# Altium PCB PCB_Minuteire.PcbDoc
Units mm, origin at the board's own origin, x right, y up, seen from the top; angles counter-clockwise.
Board outline 100 x 100 mm, 2 copper layers (Top Layer, Bottom Layer), stack 1.671 mm thick; 18 components, 24 nets, 92 pads, 1 vias.
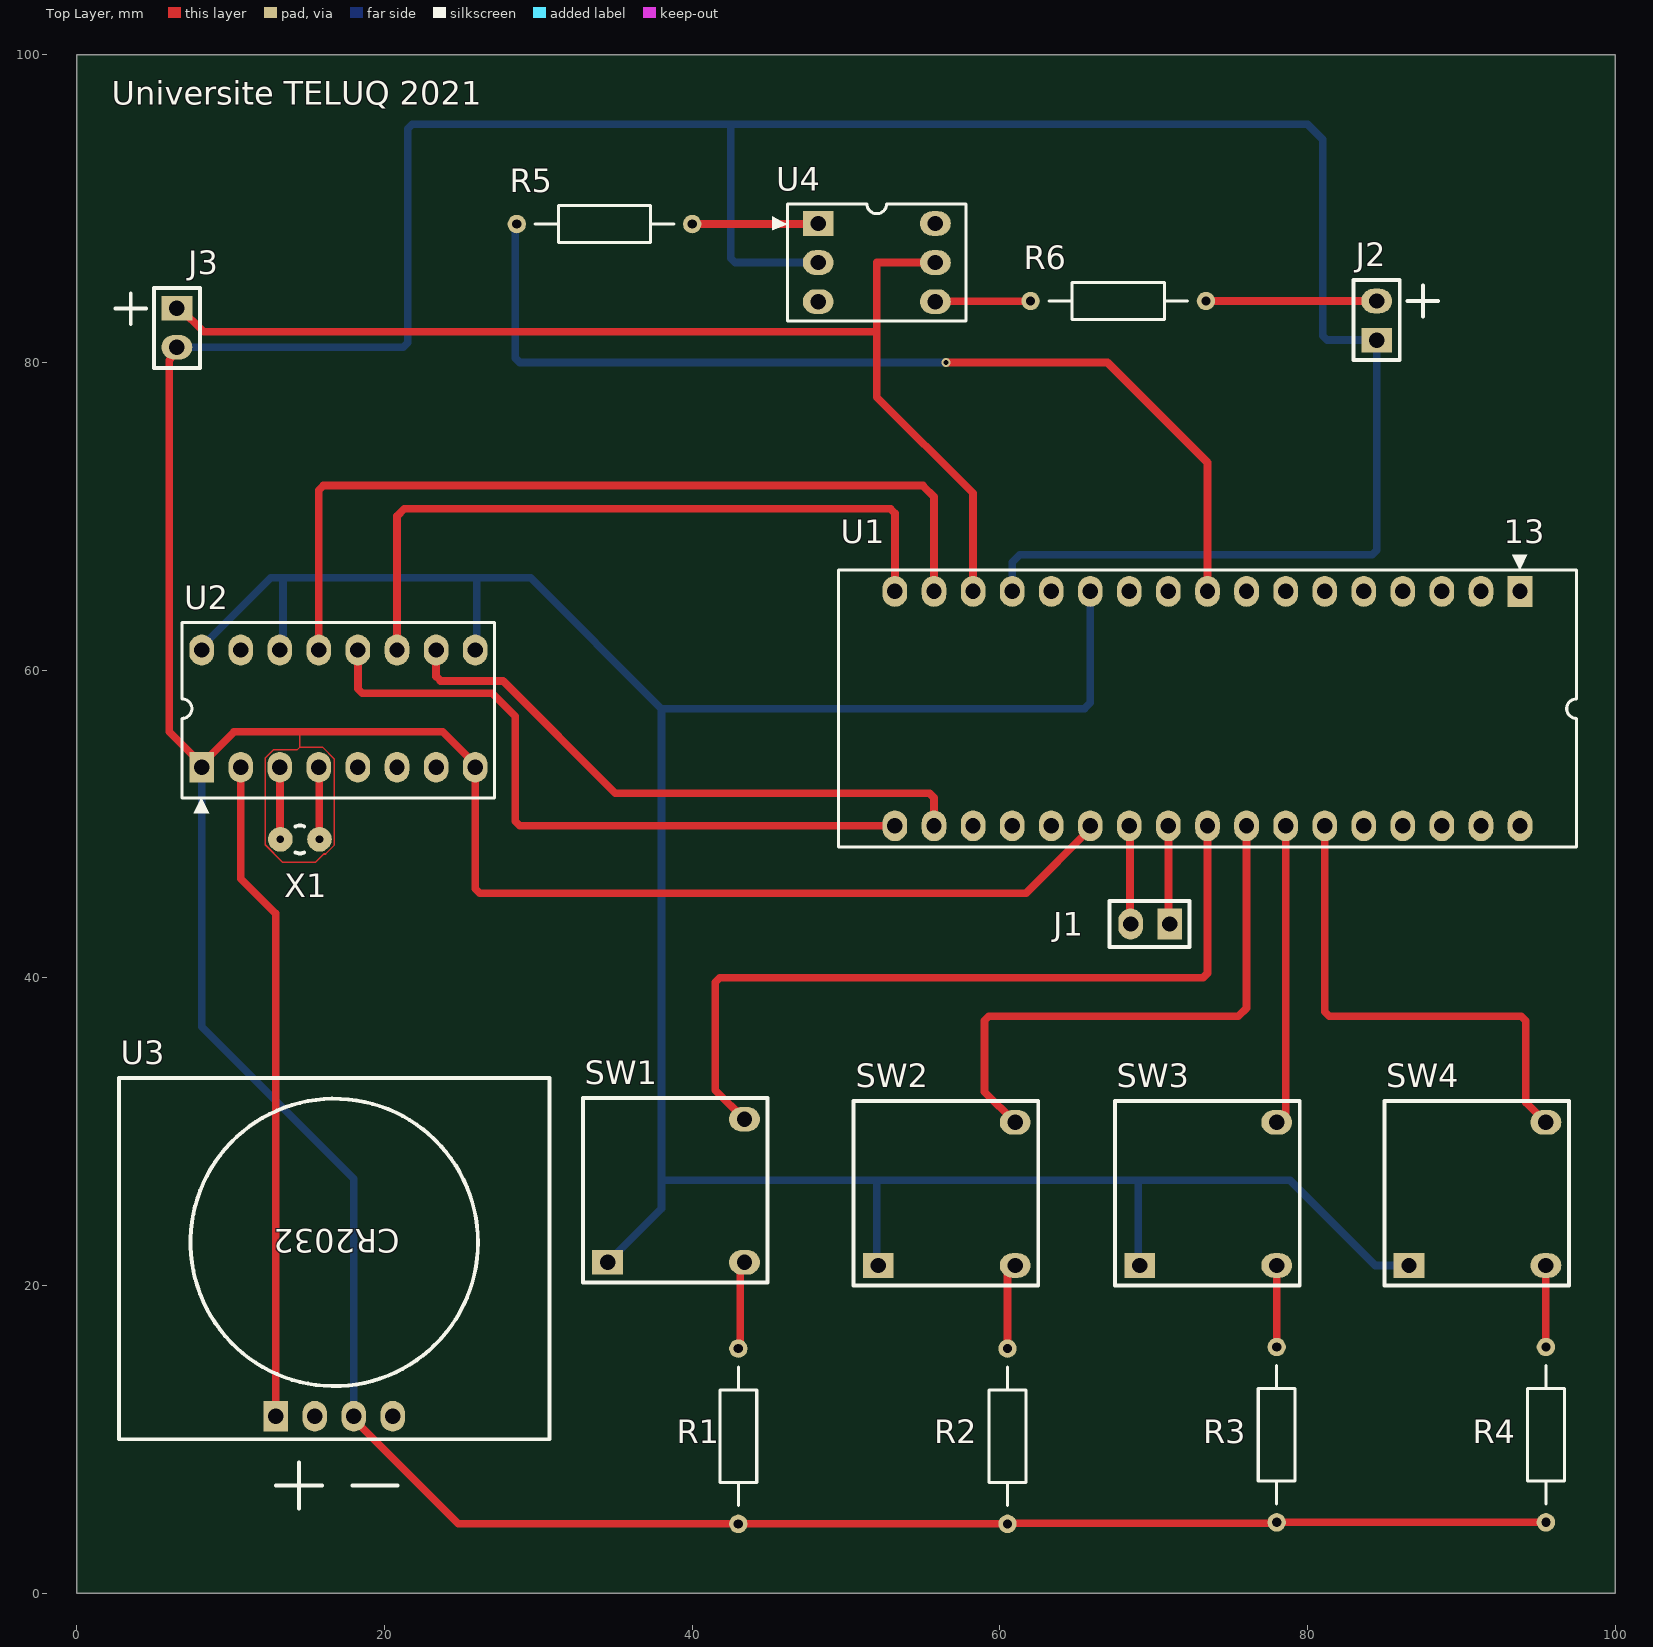
[diagram p0: Top Layer view]
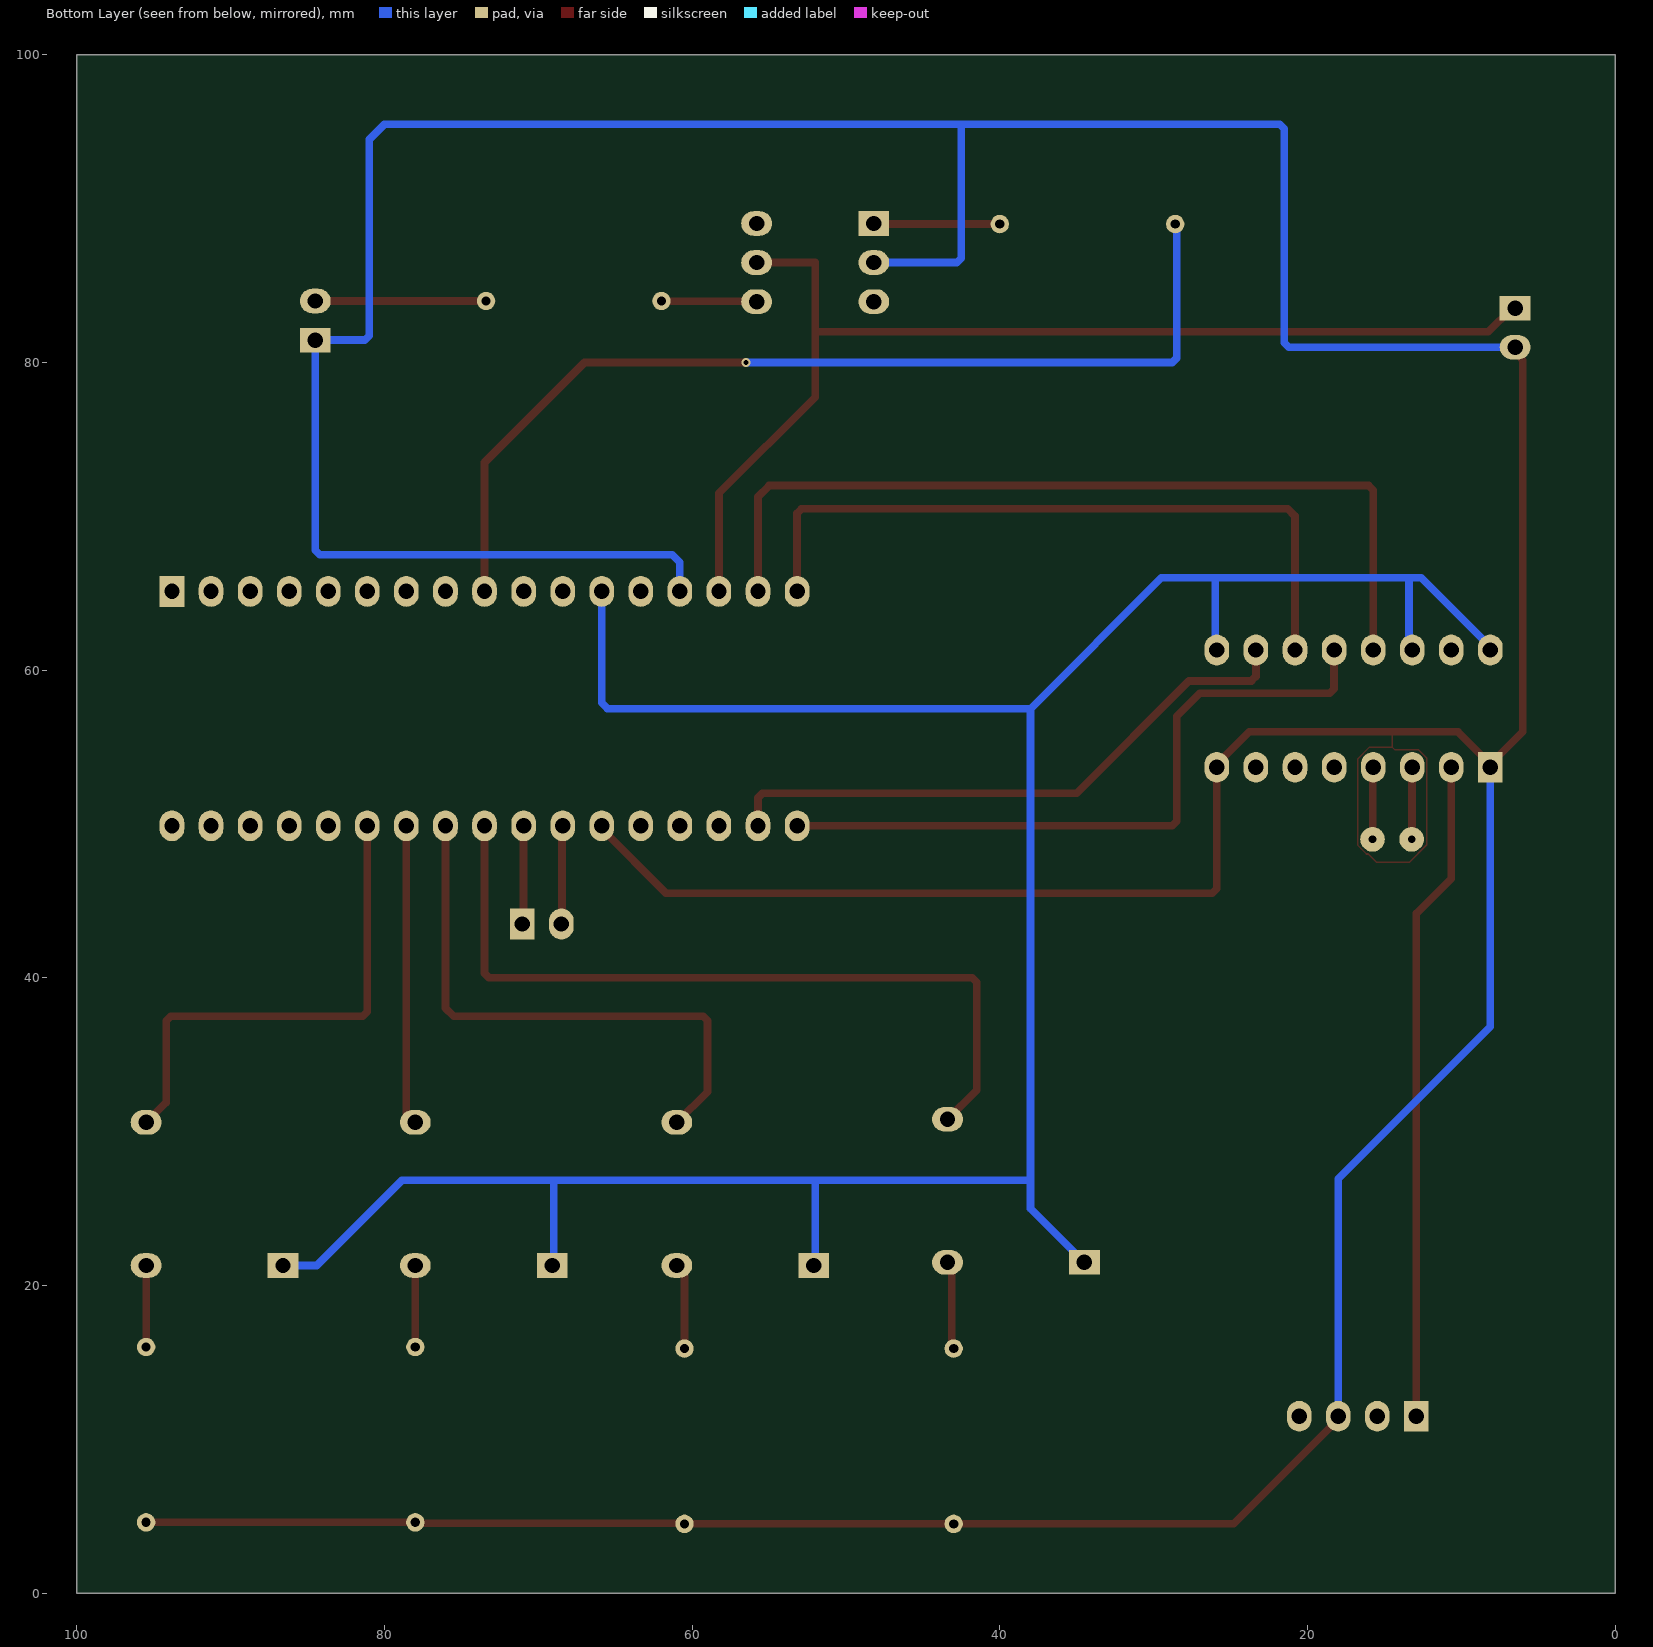
[diagram p1: Bottom Layer view, seen from below]

## Layer stack, top to bottom
Top Solder: solder mask 0.0102, Solder Resist, Dk 3.5
Top Layer: signal copper 0.0356
Dielectric 1: dielectric 1.6, FR-4, Dk 4.8
Bottom Layer: signal copper 0.0356
Bottom Solder: solder mask 0.0102, Solder Resist, Dk 3.5

## Board outline
0,0 0,100 100,100 100,0

## Design rules (kind name [scope] priority, off if disabled: settings)
Clearance [All] p1: gap=0.1 ignorepadtopadclearanceinfootprint=FALSE
PolygonConnect [All] p1: connectstyle=Relief reliefconductorwidth=0.254 reliefentries=4 polygonreliefangle="90 Angle" airgapwidth=0.254
RoutingVias [All] p1: holewidth=0.3 width=0.6 viastyle="Through Hole" minholewidth=0.3 minwidth=0.6 maxholewidth=0.3 maxwidth=0.6
SolderMaskExpansion [All] p1: expansion=0.102 istentingtop=FALSE
Width [All] p1: maxlimit=1 minlimit=0.08 preferedwidth=0.5
30 further rules are at their usual default settings.

## Components (designator, comment, footprint, x,y, rotation, side; value= is the part's Value field where it differs from the comment)
J1 "2 pin header" "Dual header" 71.04,43.5 r270 top
J2 "2 pin header" "Dual header" 84.5,81.46 r180 top
J3 "2 pin header" "Dual header" 6.5,83.54 r0 top
R1 "10K" Res_TH 43,4.5 r90 top
R2 "10K" Res_TH 60.5,4.5 r90 top
R3 "10K" Res_TH 78,4.6 r90 top
R4 "10K" Res_TH 95.5,4.6 r90 top
R5 "1K" Res_TH 28.6,89 r0 top
R6 "1K" Res_TH 62,84 r0 top
SW1 "Push Button" "Push button" 38.9,26.2 r0 top
SW2 "Push Button" "Push button" 56.5,26 r0 top
SW3 "Push Button" "Push button" 73.5,26 r0 top
SW4 "Push Button" "Push button" 91,26 r0 top
U1 "Arduino Micro" Micro-C 73.5,57.5 r270 top
U2 "RTC" DIP16 17,57.5 r90 top
U3 "CR2032 Socket" "Battery socket" 16.73,11.5 r90 top
U4 "Optocoupler" DIP6 52,86.5 r0 top
X1 "Crystal 32.768kHz" Crystal 14.5,49 r180 top

## Footprints (in the part's own frame and the unit in brackets; to place one, negate y for a bottom-side part, rotate by r counter-clockwise, add the part's x,y. Pads: shape width x height; smd on the part's side, far side on the other; paste and mask are expansions set on the pad)
"Battery socket" [mm]
  rect 2x1.6 hole 1: 1(0,3.81)
  oval 2x1.6 hole 1: 2(0,1.27) 3(0,-1.27) 4(0,-3.81)
  silkscreen extent -6,-14 22,14
Crystal [mm]
  round 1.6 hole 0.5: 1(-1.27,0) 2(1.27,0)
  silkscreen extent -0.28,-0.9 0.28,0.9
DIP6 [mm]
  rect 2x1.6 hole 1: 1(-3.81,2.54)
  oval 2x1.6 hole 1: 2(-3.81,0) 3(-3.81,-2.54) 4(3.81,-2.54) 5(3.81,0) 6(3.81,2.54)
  silkscreen extent -6.8,-3.81 5.8,3.81
DIP16 [mm]
  rect 2x1.6 hole 1: 1(-3.81,8.89)
  oval 2x1.6 hole 1: 2(-3.81,6.35) 3(-3.81,3.81) 4(-3.81,1.27) 5(-3.81,-1.27) 6(-3.81,-3.81) 7(-3.81,-6.35) 8(-3.81,-8.89) 9(3.81,-8.89) 10(3.81,-6.35) 11(3.81,-3.81) 12(3.81,-1.27) 13(3.81,1.27) 14(3.81,3.81) 15(3.81,6.35) 16(3.81,8.89)
  silkscreen extent -6.8,-10.16 5.6,10.16
"Dual header" [mm]
  rect 2x1.6 hole 1: 1(0,0)
  oval 2x1.6 hole 1: 2(0,-2.54)
  silkscreen extent -1.5,-3.9 1.5,1.3
Micro-C [mm]
  rect 2x1.6 hole 1: 1(-7.62,20.32)
  oval 2x1.6 hole 1: 2(-7.62,17.78) 3(-7.62,15.24) 4(-7.62,12.7) 5(-7.62,10.16) 6(-7.62,7.62) 7(-7.62,5.08) 8(-7.62,2.54) 9(-7.62,0) 10(-7.62,-2.54) 11(-7.62,-5.08) 12(-7.62,-7.62) 13(-7.62,-10.16) 14(-7.62,-12.7) 15(-7.62,-15.24) 16(-7.62,-17.78) 17(-7.62,-20.32) 18(7.62,-20.32) 19(7.62,-17.78) 20(7.62,-15.24) 21(7.62,-12.7) 22(7.62,-10.16) 23(7.62,-7.62) 24(7.62,-5.08) 25(7.62,-2.54) 26(7.62,0) 27(7.62,2.54) 28(7.62,5.08) 29(7.62,7.62) 30(7.62,10.16) 31(7.62,12.7) 32(7.62,15.24) 33(7.62,17.78) 34(7.62,20.32)
  silkscreen extent -10,-24 9,23.99
"Push button" [mm]
  rect 2x1.6 hole 1: 1(-4.4,-4.7)
  oval 2x1.6 hole 1: 2(4.5,4.6) 3(4.5,-4.7)
  silkscreen extent -6,-6 6,6
Res_TH [mm]
  round 1.2 hole 0.6: 1(0,0) 2(11.4,0)
  silkscreen extent 1.2,-1.2 10.2,1.2, body extent -0.36,-1.31 11.7,1.31, height 2.61

## Part data
J1 J2 J3: library part M20-9990246, "2.54mm (0.1\") Pitch SIL Vertical PC Tail Pin Header, 6.1mm mating pin height, tin, 2 contacts", Case/Package=SIL, Color=Black, Contact Resistance=30mR, Current Rating=3A, Insulation Resistance=10GR, Manufacturer=Harwin, Max Operating Temperature=105°C, Min Operating Temperature=-40°C, Package Quantity=1000, Supplier Part Number 1=952-2262-ND, Voltage Rating (AC)=750V, Category="Headers and Wire Housings", ComponentLink1Description=https://datasheet.ciiva.com/22660/1830818-22660571.pdf?src-supplier=Element14, ComponentLink1URL=https://datasheet.ciiva.com/22660/1830818-22660571.pdf?src-supplier=Element14, ComponentLink2Description=https://datasheet.ciiva.com/11745/0900766b81034e61-11745755.pdf?src-supplier=RSComponents, ComponentLink2URL=https://datasheet.ciiva.com/11745/0900766b81034e61-11745755.pdf?src-supplier=RSComponents, ComponentLink3Description=https://datasheet.ciiva.com/8046/315376-8046930.pdf?src-supplier=Element14, ComponentLink3URL=https://datasheet.ciiva.com/8046/315376-8046930.pdf?src-supplier=Element14, ComponentLink4Description=https://datasheet.ciiva.com/6833/m20-999-6833368.pdf?src-supplier=Digi-Key, ComponentLink4URL=https://datasheet.ciiva.com/6833/m20-999-6833368.pdf?src-supplier=Digi-Key, ComponentLink5Description=https://datasheet.ciiva.com/26852/getdatasheetpartid-384170-26852203.pdf?src-supplier=Verical, ComponentLink5URL=https://datasheet.ciiva.com/26852/getdatasheetpartid-384170-26852203.pdf?src-supplier=Verical, Connector Type="Male Pin", Contact Material=Brass,Bronze, Contact Mating Length=0.24inch, Contact Plating=Tin, Contact Type="Male Pin", Depth=2.54mm, Gender=Male, Housing Color=Black, Housing Material=Nylon, Length=5.08mm, Manufacturer Part Number=M20-9990246, Max Current Rating=3A, Mount="Through Hole", Number of Contacts=2, Number of Positions=2, Number of Rows=1, Orientation=Straight, Packaging=Bulk, Pitch=2.54mm, Pricing 1="1=0.13000, 10=0.10300, 100=0.07610, 500=0.06300, 1000=0.05512, 5000=0.04725, 10000=0.04594 (USD)", Radiation Hardening=No, REACH SVHC="No SVHC", RoHS=Yes, Series=M20, Stock 1=37006, Supplier 1=Digi-Key, Termination=Solder
R1 R2 R3 R4: library part MFR-25FRF52-10K, "Res Metal Film 10K Ohm 1% 1/4W ±100ppm/°C Conformal Axial Thru-Hole T/R", Case/Package=Axial, Manufacturer=Yageo, Max Operating Temperature=155°C, Max Power Dissipation=250mW, Min Operating Temperature=-55°C, Package Quantity=5000, Resistance=10kR, Resistor Type="Metal Film", Supplier Part Number 1=10.0KXTR-ND, Temperature Coefficient=100ppm/°C, Tolerance=1%, Voltage Rating=250V, Voltage Rating (DC)=200V, Category="Through-Hole Resistors", ComponentLink1Description=https://datasheet.ciiva.com/25645/yageolr-mfr-2013-25645549.pdf?src-supplier=Digi-Key, ComponentLink1URL=https://datasheet.ciiva.com/25645/yageolr-mfr-2013-25645549.pdf?src-supplier=Digi-Key, Lead Diameter=0.6mm, Lead Free="Lead Free", Length=0.248inch, Manufacturer Part Number=MFR-25FRF52-10K, Number of Terminations=2, Packaging="Tape and Reel", Power Rating=250mW, Pricing 1="5000=0.01047, 10000=0.00939, 25000=0.00862, 50000=0.00819 (USD)", RoHS=Yes, RoHS Compliant=Yes, Series=MFR, Stock 1=345000, Supplier 1=Digi-Key, Termination=Axial, Width=6.3mm
R5 R6: library part MFR-25FRF52-1K, "Res Metal Film 1K Ohm 1% 0.25W(1/4W) ±100ppm/C AXL Automotive T/R", Case/Package=Axial, Manufacturer=Yageo, Max Operating Temperature=155°C, Max Power Dissipation=250mW, Min Operating Temperature=-55°C, Package Quantity=5000, Resistance=1kR, Resistor Type="Metal Film", Supplier Part Number 1=1.00KXTR-ND, Temperature Coefficient=100ppm/°C, Tolerance=1%, Voltage Rating=250V, Voltage Rating (DC)=200V, Category="Through-Hole Resistors", ComponentLink1Description=https://datasheet.ciiva.com/25645/yageolr-mfr-2013-25645548.pdf?src-supplier=Digi-Key, ComponentLink1URL=https://datasheet.ciiva.com/25645/yageolr-mfr-2013-25645548.pdf?src-supplier=Digi-Key, Lead Diameter=0.6mm, Lead Free="Lead Free", Length=0.248inch, Manufacturer Part Number=MFR-25FRF52-1K, Mount="Through Hole", Number of Terminations=2, Packaging="Tape and Reel", Power Rating=250mW, Pricing 1="5000=0.01047, 10000=0.00939, 25000=0.00862, 50000=0.00819 (USD)", RoHS=Yes, RoHS Compliant=Yes, Series=MFR, Stock 1=95000, Supplier 1=Digi-Key, Termination=Axial, Width=6.3mm
SW1 SW2 SW3 SW4: library part FSM103, "Switch Tactile OFF (ON) SPST Round Button PC Pins 0.05A 24VDC 1.57N Thru-Hole Loose", Actuator Color=Black, Contact Current Rating=50mA, Contact Resistance=100mR, Manufacturer="TE Connectivity Alcoswitch", Max Operating Temperature=85°C, Max Voltage Rating (DC)=12V, Min Operating Temperature=-35°C, Operating Force=1.57N, Package Quantity=400, Supplier Part Number 1=450-1158-ND, Voltage Rating=24V, Actuator Length=3.4mm, Actuator Material=Polyester, Category=Uncategorized, ComponentLink1Description=https://datasheet.ciiva.com/8661/eng-cd-1437565-5-d-8661873.pdf?src-supplier=Avnet, ComponentLink1URL=https://datasheet.ciiva.com/8661/eng-cd-1437565-5-d-8661873.pdf?src-supplier=Avnet, ComponentLink2Description=https://datasheet.ciiva.com/2899/eng-cd-1437565-5-e2-2899955.pdf?src-supplier=Digi-Key, ComponentLink2URL=https://datasheet.ciiva.com/2899/eng-cd-1437565-5-e2-2899955.pdf?src-supplier=Digi-Key, ComponentLink3Description=https://datasheet.ciiva.com/5809/eng-cd-1437565-5-e2-5809302.pdf?src-supplier=Farnell, ComponentLink3URL=https://datasheet.ciiva.com/5809/eng-cd-1437565-5-e2-5809302.pdf?src-supplier=Farnell, ComponentLink4Description=https://datasheet.ciiva.com/16534/eng-cd-1437565-5-d-16534933.pdf?src-supplier=Avnet+Europe, ComponentLink4URL=https://datasheet.ciiva.com/16534/eng-cd-1437565-5-d-16534933.pdf?src-supplier=Avnet+Europe, ComponentLink5Description=https://datasheet.ciiva.com/31838/eng-cat-1308390-0904-e15-e25-31838910.pdf?src-supplier=Onlinecomponents.com, ComponentLink5URL=https://datasheet.ciiva.com/31838/eng-cat-1308390-0904-e15-e25-31838910.pdf?src-supplier=Onlinecomponents.com, ComponentLink6Description=https://datasheet.ciiva.com/7635/921681-7635435.pdf?src-supplier=Element14, ComponentLink6URL=https://datasheet.ciiva.com/7635/921681-7635435.pdf?src-supplier=Element14, Contact Material=Brass, Contact Plating=Silver, Current Rating=50mA, Depth=14.1mm, Electrical Life=100000Cycles, Illumination Type=Non-Illuminated, Length=12mm, Manufacturer Part Number=FSM103, Max Current Rating=50mA, Mechanical Life=100000Cycles, Mount="Through Hole", Orientation=Straight, Packaging="Loose Piece", Pricing 1="1=0.38000, 10=0.36900, 25=0.34720, 100=0.30150, 250=0.27348, 500=0.25440, 1000=0.22896, 2500=0.21497, 5000=0.19970 (USD)", Radiation Hardening=No, REACH SVHC=Unknown, RoHS=Yes, RoHS Compliant=Yes, Series="FSM100 ~ 104", Stock 1=1345, Supplier 1=Digi-Key, Switch Function=Off-Mom, Switch Travel=0.3mm, Termination="PC Pins", Throw Configuration=SPST, Type=Switch, Voltage Rating (DC)=12V, Width=12mm
U1: library part A000053, "ATmega32u4 Microcontroller Micro Development Board 16MHz CPU 2.5KB RAM 1KB/32KB EEPROM/Flash", Manufacturer=Arduino, Operating Supply Voltage=5V, Package Quantity=1, Supplier Part Number 1=1050-1066-ND, Category="Embedded Processors and Controllers", ComponentLink1Description=https://datasheet.ciiva.com/29354/a000053-web-29354346.pdf?src-supplier=Digi-Key, ComponentLink1URL=https://datasheet.ciiva.com/29354/a000053-web-29354346.pdf?src-supplier=Digi-Key, ComponentLink2Description=https://datasheet.ciiva.com/20168/73-4614-20168561.pdf?src-supplier=Rapid+Electronics, ComponentLink2URL=https://datasheet.ciiva.com/20168/73-4614-20168561.pdf?src-supplier=Rapid+Electronics, ComponentLink3Description=https://datasheet.ciiva.com/27059/2207700-27059801.pdf?src-supplier=Jameco, ComponentLink3URL=https://datasheet.ciiva.com/27059/2207700-27059801.pdf?src-supplier=Jameco, ComponentLink4Description=https://datasheet.ciiva.com/22632/1685581-22632353.pdf?src-supplier=Element14, ComponentLink4URL=https://datasheet.ciiva.com/22632/1685581-22632353.pdf?src-supplier=Element14, ComponentLink5Description=https://datasheet.ciiva.com/14175/micro-eng-tds-14175737.pdf?src-supplier=Distrelec, ComponentLink5URL=https://datasheet.ciiva.com/14175/micro-eng-tds-14175737.pdf?src-supplier=Distrelec, ComponentLink6Description=https://datasheet.ciiva.com/25630/0900766b8119187a-25630646.pdf?src-supplier=RSComponents, ComponentLink6URL=https://datasheet.ciiva.com/25630/0900766b8119187a-25630646.pdf?src-supplier=RSComponents, Core Architecture=AVR, Data Bus Width=8b, Evaluation Kit=Yes, Height=0.05inch, Interface=USB, Length=2inch, Manufacturer Part Number=A000053, Number of Bits=8, Pricing 1="1=20.70000 (USD)", REACH SVHC=Unknown, RoHS=Yes, Series="AVR® ATmega", Stock 1=535, Supplier 1=Digi-Key, Weight=0.02lb, Width=1inch
U2: library part DS1306N+, "DS1306 Series 2 to 5.5 V 96B Battery-Backed NV RAM Serial Alarm RTC - DIP-16", Case/Package=DIP, Manufacturer=Maxim, Max Operating Temperature=70°C, Max Supply Voltage=5.5V, Min Operating Temperature=0°C, Min Supply Voltage=2V, Package Quantity=25, Supplier Part Number 1=73Y1205, Category="Real Time Clocks", ComponentLink1Description=https://datasheet.ciiva.com/26795/ds1306n-26795569.pdf?src-supplier=IIIC, ComponentLink1URL=https://datasheet.ciiva.com/26795/ds1306n-26795569.pdf?src-supplier=IIIC, ComponentLink2Description=https://datasheet.ciiva.com/3304/ds1306-3304455.pdf?src-supplier=Avnet, ComponentLink2URL=https://datasheet.ciiva.com/3304/ds1306-3304455.pdf?src-supplier=Avnet, ComponentLink3Description=https://datasheet.ciiva.com/1240/ds1306-1240611.pdf?src-supplier=Digi-Key, ComponentLink3URL=https://datasheet.ciiva.com/1240/ds1306-1240611.pdf?src-supplier=Digi-Key, Date Format=YY-MM-DD-dd, Height=4.45mm, Interface=SPI, Lead Free="Lead Free", Length=19.43mm, Logic Function=Clock, Manufacturer Part Number=DS1306N+, Memory Size=96B, Mount="Through Hole", Number of Pins=16, Packaging=Rail/Tube, Pricing 1="1=7.69000, 10=6.94000, 25=6.62000, 50=6.19000, 100=5.75000, 250=5.49000 (USD)", Radiation Hardening=No, REACH SVHC=Unknown, RoHS=Yes, RoHS Compliant=Yes, Series=-, Stock 1=3, Supplier 1=Newark, Time Format=HH:MM:SS, Width=7.87mm
U3: library part 1870, "Heyco RDD Lockit Strain Relief Bushings Straight-Thru RDD 101A BLACK", Manufacturer="Adafruit Industries", Supplier Part Number 1=1528-2012-ND, Category=Connectors, Manufacturer Part Number=1870, Pricing 1="1=2.50000 (USD)", RoHS=Yes, Stock 1=500, Supplier 1=Digi-Key
U4: library part 4N35, "Single Channel 80 V 5000 Vrms Phototransistor Optocoupler Through Hole - DIP-6", Case/Package=DIP, Collector Emitter Breakdown Voltage=30V, Collector Emitter Saturation Voltage=300mV, Collector Emitter Voltage (VCEO)=70V, Current Transfer Ratio=50%, Forward Current=50mA, Forward Voltage=1.5V, Input Current=10mA, Isolation Voltage=5kV, Isolation Voltage-Max=5.3kV, Manufacturer=Vishay, Max Collector Current=100mA, Max Input Current=60mA, Max Operating Temperature=100°C, Max Power Dissipation=70mW, Min Operating Temperature=-55°C, Package Quantity=2000, Reverse Breakdown Voltage=6V, Approvals=UL,BSI,FIMKO, Category=Optocouplers, Collector-emitter Voltage-Max=300mV, ComponentLink1Description=https://datasheet.ciiva.com/1247/1693303-1247044.pdf?src-supplier=Element14, ComponentLink1URL=https://datasheet.ciiva.com/1247/1693303-1247044.pdf?src-supplier=Element14, ComponentLink2Description=https://datasheet.ciiva.com/26321/60647-26321011.pdf?src-supplier=Element14, ComponentLink2URL=https://datasheet.ciiva.com/26321/60647-26321011.pdf?src-supplier=Element14, ComponentLink3Description=https://datasheet.ciiva.com/15118/getdatasheetpartid-89490-15118529.pdf?src-supplier=Verical, ComponentLink3URL=https://datasheet.ciiva.com/15118/getdatasheetpartid-89490-15118529.pdf?src-supplier=Verical, ComponentLink4Description=https://datasheet.ciiva.com/11771/0900766b80dca9c8-11771779.pdf?src-supplier=RSComponents, ComponentLink4URL=https://datasheet.ciiva.com/11771/0900766b80dca9c8-11771779.pdf?src-supplier=RSComponents, ComponentLink5Description=https://datasheet.ciiva.com/29301/152890-da-01-en-optocoupler-4n35-29301371.pdf?src-supplier=Conrad, ComponentLink5URL=https://datasheet.ciiva.com/29301/152890-da-01-en-optocoupler-4n35-29301371.pdf?src-supplier=Conrad, ComponentLink6Description=https://datasheet.ciiva.com/2086/s-110-4n354n37m-s-s-ta1rev-2086319.pdf?src-supplier=Digi-Key, ComponentLink6URL=https://datasheet.ciiva.com/2086/s-110-4n354n37m-s-s-ta1rev-2086319.pdf?src-supplier=Digi-Key, ComponentLink7Description=https://datasheet.ciiva.com/14105/4n35-7-eng-tds-14105851.pdf?src-supplier=Distrelec, ComponentLink7URL=https://datasheet.ciiva.com/14105/4n35-7-eng-tds-14105851.pdf?src-supplier=Distrelec, ComponentLink8Description=https://datasheet.ciiva.com/3305/4n35-3305941.pdf?src-supplier=Avnet, ComponentLink8URL=https://datasheet.ciiva.com/3305/4n35-3305941.pdf?src-supplier=Avnet, ComponentLink9Description=https://datasheet.ciiva.com/16317/4n35-16317882.pdf?src-supplier=Future+Electronics, ComponentLink9URL=https://datasheet.ciiva.com/16317/4n35-16317882.pdf?src-supplier=Future+Electronics, ComponentLink10Description=https://datasheet.ciiva.com/25900/4n35-25900614.pdf?src-supplier=Avnet+Europe, ComponentLink10URL=https://datasheet.ciiva.com/25900/4n35-25900614.pdf?src-supplier=Avnet+Europe, ComponentLink11Description=https://datasheet.ciiva.com/2087/4n35-2087114.pdf?src-supplier=Digi-Key, ComponentLink11URL=https://datasheet.ciiva.com/2087/4n35-2087114.pdf?src-supplier=Digi-Key, ComponentLink12Description=https://datasheet.ciiva.com/1333/1533488-1333901.pdf?src-supplier=Newark, ComponentLink12URL=https://datasheet.ciiva.com/1333/1533488-1333901.pdf?src-supplier=Newark, Input Type=DC, Lead Free="Lead Free", Manufacturer Part Number=4N35, Max Output Voltage=30V, Mount="Through Hole", Number of Channels=1, Number of Circuits=1, Number of Elements=1, Number of Pins=6, Output Current per Channel=100mA, Output Voltage=30V, Packaging=Rail/Tube, Power Dissipation=70mW, Pricing 1="1=0.55000, 10=0.47300, 100=0.35320, 500=0.27750, 1000=0.21444, 2000=0.19552, 5000=0.18290, 10000=0.17850 (USD)", Radiation Hardening=No, REACH SVHC=Unknown, Reverse Voltage (DC)=6V, Rise Time=3us, RoHS=Yes, RoHS Compliant=Yes, Series=-, Stock 1=2871, Supplier 1=Digi-Key
X1: library part CFS-20632768DZBB, "Crystal 0.032768MHz ±20ppm (Tol) 6pF Flexural 35000Ohm 2-Pin Thru-Hole Bulk", Case/Package=Radial, ESR (Equivalent Series Resistance)=35kR, Frequency=32.768kHz, Frequency Tolerance=20ppm, Load Capacitance=6pF, Manufacturer=Citizen, Max Operating Temperature=70°C, Min Operating Temperature=-20°C, Supplier Part Number 1=300-8301-ND, Category=Crystals, ComponentLink1Description=http://cfd.citizen.co.jp/english/prod-tech/product/pdf/datasheet_TF/CFS-206_CFS-145_E.pdf?src-supplier=Digi-Key, ComponentLink1URL=http://cfd.citizen.co.jp/english/prod-tech/product/pdf/datasheet_TF/CFS-206_CFS-145_E.pdf?src-supplier=Digi-Key, Lead Free="Lead Free", Manufacturer Part Number=CFS-20632768DZBB, Mount="Through Hole", Packaging=Bulk, Pricing 1="1=0.26000, 10=0.22000, 50=0.19800, 100=0.17600, 500=0.16720, 1000=0.14080, 2500=0.13200, 5000=0.12760, 10000=0.12320 (USD)", RoHS=Yes, RoHS Compliant=Yes, Stock 1=136913, Supplier 1=Digi-Key

## Via types
v1: diameter 0.6, hole 0.3, Top Layer to Bottom Layer, 1 vias

## Nets (pads, with @x,y where several pads share a name; then routed paths per layer and width w, separated by ;. In a path a pad name is that pad's centre, name@x,y a point inside that pad or via, vN(x,y) a via of type N, cw(c..) or ccw(c..) an arc to the next point about the centre after c; other vN are vias at no path point)
"9V SSR": J2.2 R6.2 | length 11.1
  Top Layer w0.5: R6.2 J2.2
+5V: SW1.1 SW2.1 SW3.1 SW4.1 U1.12 U2.9 U2.14 U2.16 | length 179.8
  Bottom Layer w0.5: U2.16 8.11,61.51 12.6,66 13.5,66 ; U2.14 13.4,61.52 13.4,65.9 13.5,66 ; U2.9 26,61.42 26,66 ; SW1.1 38,25 38,26.835 ; SW2.1 52,21.4 52,26.835 ; U1.12 65.88,57.88 65.5,57.5 38,57.5 ; SW3.1 69,21.4 69,26.835 ; SW4.1 84.4,21.3 78.865,26.835 69,26.835 ; 13.5,66 26,66 ; 26,66 29.5,66 38,57.5 ; 38,26.835 52,26.835 ; 38,26.835 38,57.5 ; 52,26.835 69,26.835
+9V: J3.1 U1.15 U4.5 | length 73.9
  Top Layer w0.5: J3.1 6.7,83.54 8.24,82 52,82 ; U4.5 52,86.5 52,82 ; U1.15 58.26,71.496 52,77.756 52,82
BACK: SW1.2 U1.26 | length 51.5
  Top Layer w0.5: SW1.2 41.5,32.7 41.5,39.707 41.793,40 73.207,40 73.5,40.293 U1.26
CIPO: U1.16 U2.13 | length 57
  Top Layer w0.5: U2.13 15.73,71.707 16.023,72 55,72 55.72,71.28 U1.16
COPI: U1.18 U2.12 | length 45.1
  Top Layer w0.5: U2.12 18.27,58.793 18.563,58.5 27,58.5 28.5,57 28.5,50.173 28.793,49.88 U1.18
CS: U1.19 U2.10 | length 39.2
  Top Layer w0.5: U2.10 23.35,59.593 23.643,59.3 27.7,59.3 35,52 55.427,52 55.72,51.707 U1.19
ENTER: SW4.2 U1.29 | length 32.6
  Top Layer w0.5: U1.29 81.12,37.793 81.413,37.5 93.907,37.5 94.2,37.207 94.2,31.9 SW4.2
GND: J2.1 J3.2 R1.1 R2.1 R3.1 R4.1 U1.14 U1.23 U2.1 U2.8 U3.3 U4.2 | length 407.2
  Top Layer w0.1: 14.5,56 14.5,55 ; 14.5,55 14.34,54.84 12.796,54.84 12.24,54.284 12.24,48.646 13.386,47.5 15.5,47.5 16.05,48.05 16.164,48.05 16.72,48.606 16.72,54.244 15.964,55 14.5,55
  Top Layer w0.5: J3.2 6.09,80.59 6.09,80.247 6,80.157 6,56 U2.1@8.11,53.89 ; U2.1 U2.1@8.11,53.89 ; U3.3 18,11.3 24.8,4.5 R1.1 R2.1 60.55,4.55 77.95,4.55 R3.1 R4.1 ; U1.23 65.88,49.68 61.7,45.5 26.183,45.5 25.89,45.793 U2.8 25.89,53.89 23.78,56 14.5,56 10.22,56 U2.1@8.11,53.89
  Bottom Layer w0.5: J3.2 21.207,81 21.5,81.293 21.5,95.207 21.793,95.5 42.5,95.5 ; U2.1 8.11,36.82 18,26.93 U3.3 ; U4.2 42.793,86.5 42.5,86.793 42.5,95.5 ; U1.14 60.8,67.007 61.293,67.5 84.207,67.5 84.5,67.793 J2.1 81.293,81.46 81,81.753 81,94.5 80,95.5 42.5,95.5
MOINS: SW2.2 U1.27 | length 36.7
  Top Layer w0.5: SW2.2 59,32.6 59,37.207 59.293,37.5 75.5,37.5 76.04,38.04 U1.27
NetR1_2: R1.2 SW1.3 | length 5.8
  Top Layer w0.5: R1.2 43.134,16.034 43.134,21.234 SW1.3
NetR2_2: R2.2 SW2.3 | length 5.7
  Top Layer w0.5: R2.2@60.6,16 R2.2 60.5,20.702 61,21.202 SW2.3
NetR3_2: R3.2 SW3.3 | length 5.4
  Top Layer w0.5: SW3.3 R3.2 R3.2@78.1,16.1
NetR4_2: R4.2 SW4.3 | length 5.4
  Top Layer w0.5: SW4.3 R4.2 R4.2@95.6,16.1
NetR5_2: R5.2 U4.1 | length 8.2
  Top Layer w0.5: R5.2 48.15,89 U4.1
NetR6_1: R6.1 U4.4 | length 6.2
  Top Layer w0.5: U4.4 55.83,83.98 61.98,83.98 R6.1
NetU2_2: U2.2 U3.1 | length 43.1
  Top Layer w0.5: U2.2 10.65,46.446 12.92,44.176 U3.1
NetU2_3: U2.3 X1.2 | length 4.7
  Top Layer w0.5: U2.3 13.21,53.67 13.21,49.02 X1.2
NetU2_4: U2.4 X1.1 | length 4.7
  Top Layer w0.5: U2.4 15.75,53.67 15.75,49.02 X1.1
PLUS: SW3.2 U1.28 | length 19.5
  Top Layer w0.5: SW3.2 78.58,31.18 U1.28
SCK: U1.17 U2.11 | length 46.5
  Top Layer w0.5: U2.11 20.81,70.017 21.293,70.5 52.887,70.5 53.18,70.207 U1.17
SCL: J1.1 U1.25 | length 6.4
  Top Layer w0.5: U1.25 70.96,43.58 J1.1
SDA: J1.2 U1.24 | length 6.4
  Top Layer w0.5: U1.24 68.46,49.84 68.46,43.54 J1.2
"SSR ON": R5.1 U1.9 | length 64.9
  Top Layer w0.5: v1(56.5,80) 67,80 73.5,73.5 U1.9
  Bottom Layer w0.5: R5.1 28.5,88.9 28.5,80.293 28.793,80 v1(56.5,80)
pads on no net: U1.1 U1.2 U1.3 U1.4 U1.5 U1.6 U1.7 U1.8 U1.10 U1.11 U1.13 U1.20 U1.21 U1.22 U1.30 U1.31 U1.32 U1.33 U1.34 U2.5 U2.6 U2.7 U2.15 U3.2 U3.4 U4.3 U4.6

## Silkscreen, mask and mechanical layers (free items; w line width, h text height)
Top Overlay:
  lines w0.254: 2.5,83.5 4.5,83.5 ; 3.5,82.5 3.5,84.5 ; 86.5,84 88.5,84 ; 87.5,83 87.5,85
  text "Universite TELUQ 2021" at 2.254,96.754 h1.52
  text "13" at 92.754,68.254 h1.52
Board Outline:
  the board outline again, w0.1

## Text inside footprints (layer, text, board x,y; h text height)
U3: Top Overlay "CR2032" at 20.976,23.646 h1.52 r180